# EAGLE board PCB2D (EAGLE 9.7.0)
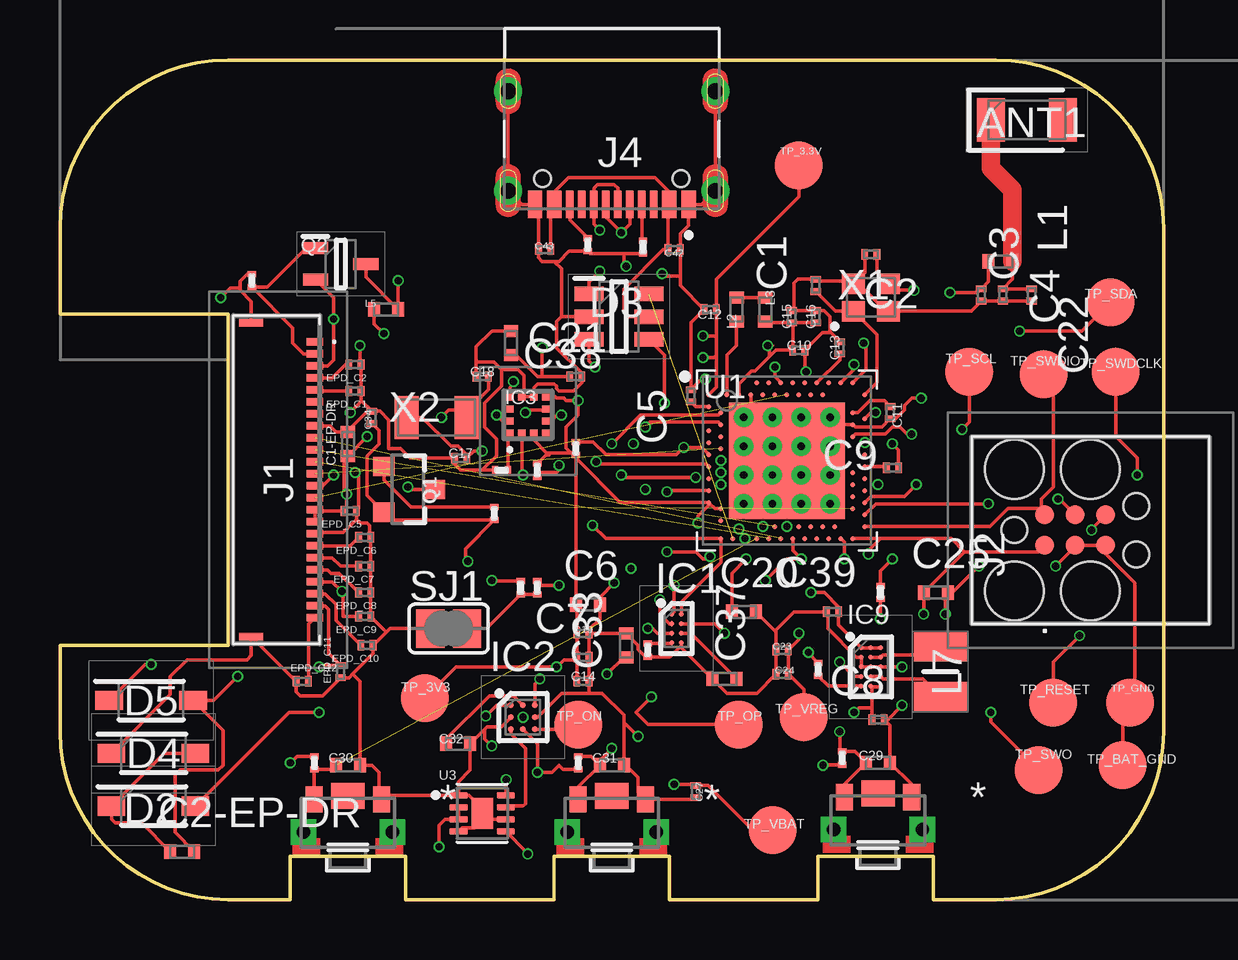
[diagram p0: board, top side]
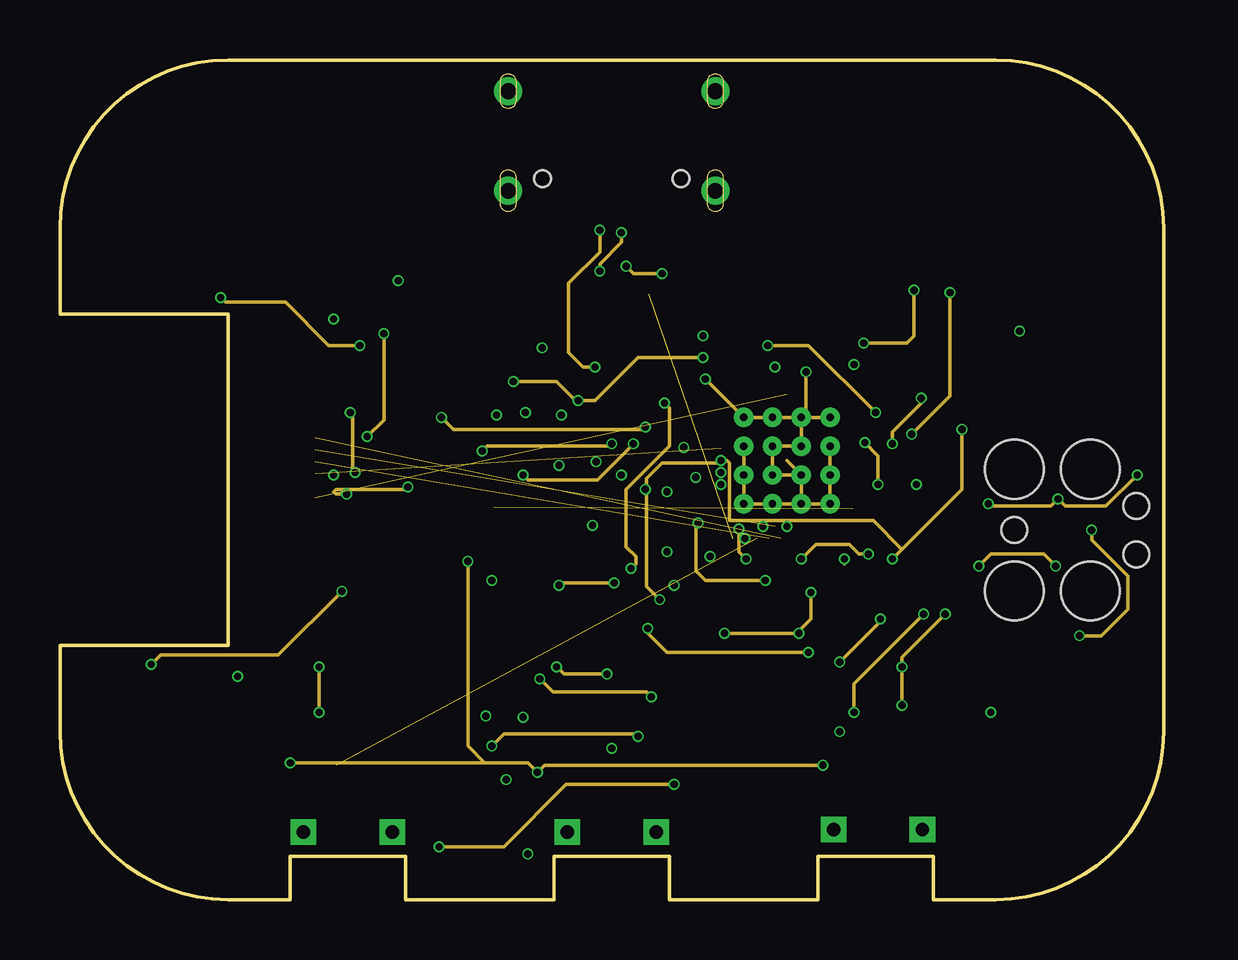
[diagram p1: board, inner layer Route2]
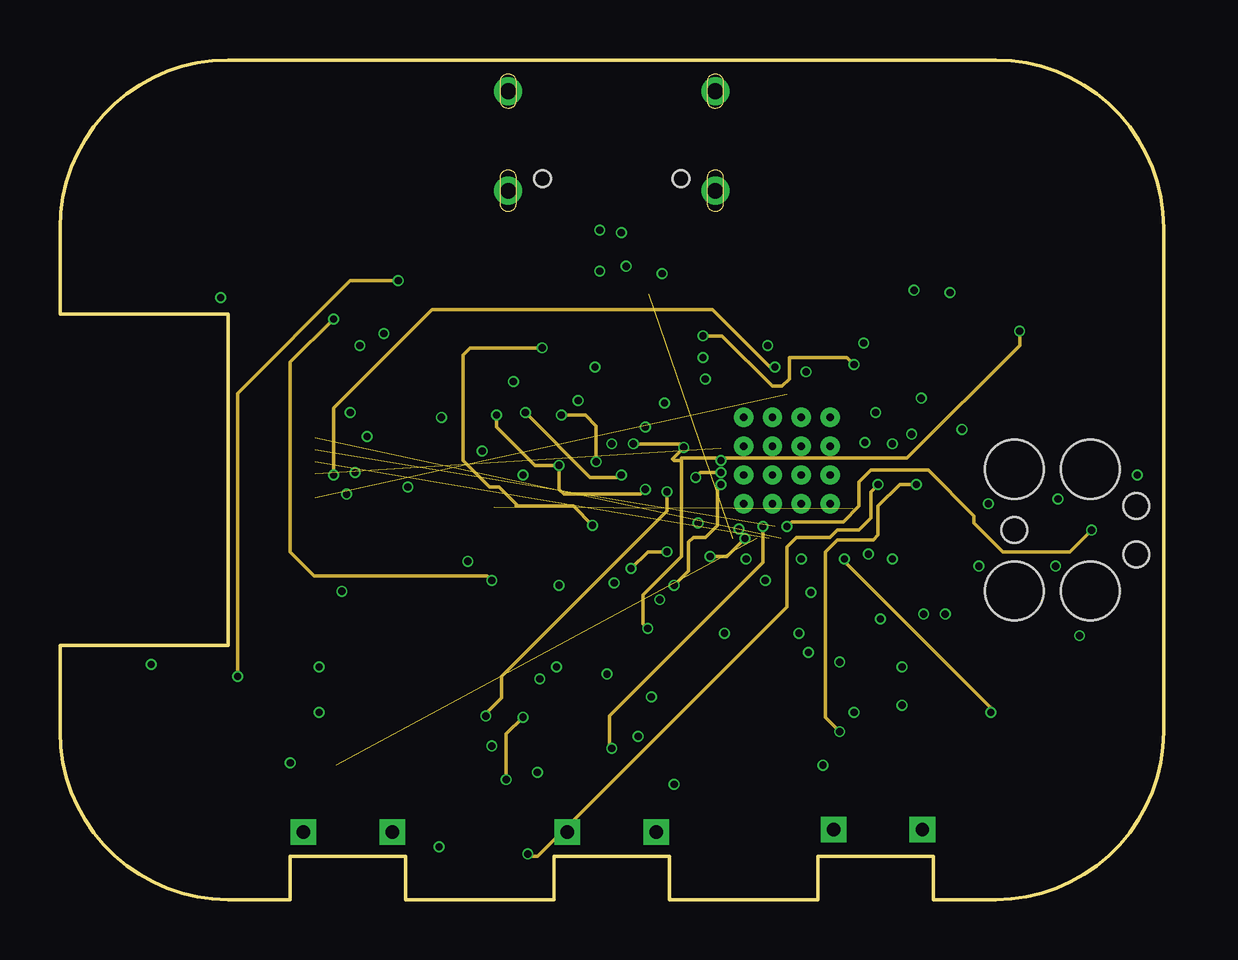
[diagram p2: board, inner layer Route15]
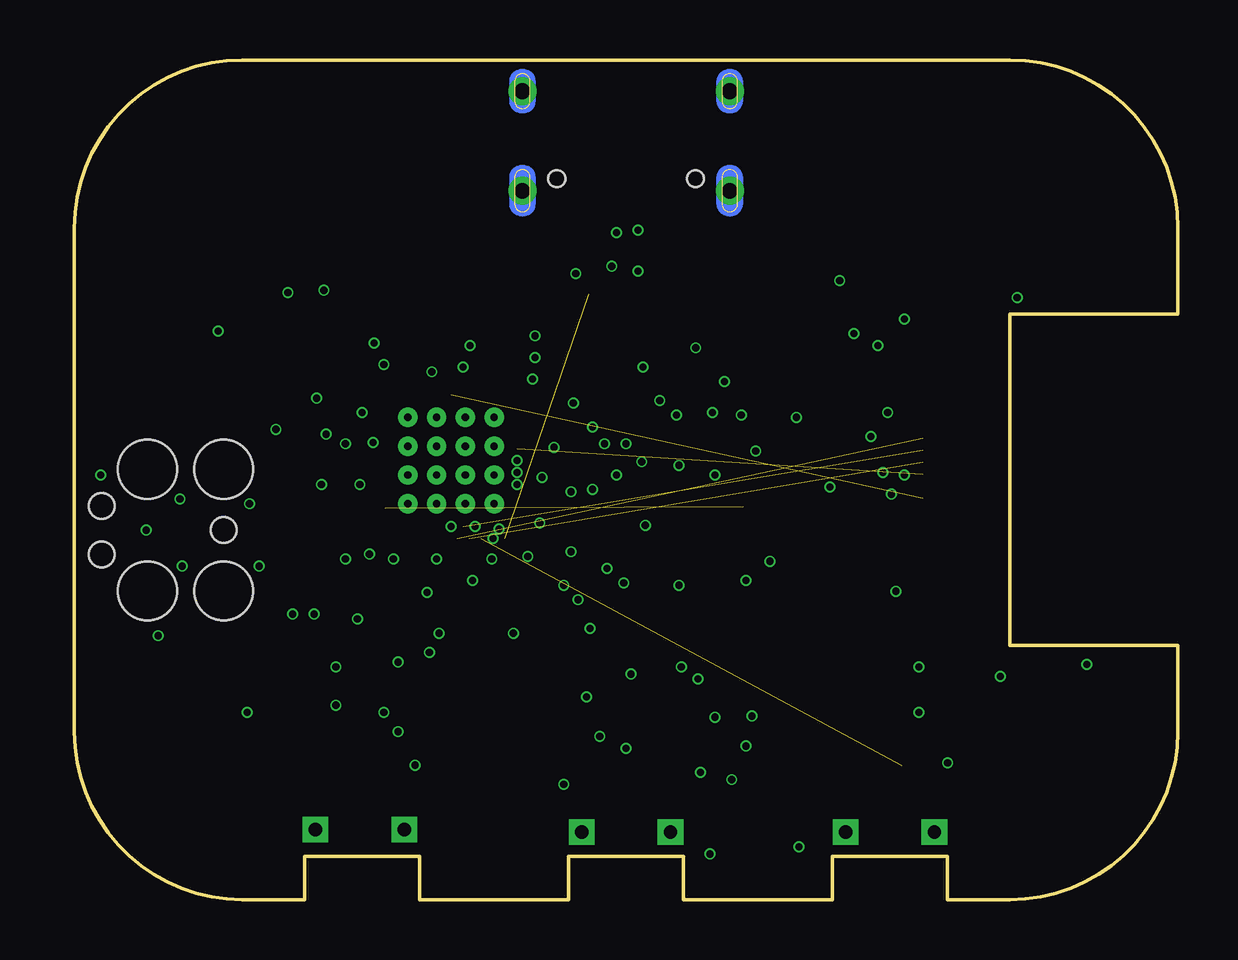
[diagram p3: board, bottom side, seen from below]

Size 46 x 35 mm. Coordinates in mm from the lower left corner, seen from the top.
Outline: 39,0 36.4,0 36.4,1.8 31.6,1.8 31.6,0 25.4,0 25.4,1.8 20.6,1.8 20.6,0 14.4,0 14.4,1.8 9.6,1.8 9.6,0 7,0 arc-90 0,7 0,10.6 7,10.6 7,24.4 0,24.4 0,28 arc-90 7,35 39,35 arc-90 46,28 46,7 arc-90 39,0
Copper layers (1+2*15+16): Top 0.035mm / dielectric 1.6mm / Route2 0.035mm / dielectric 0.15mm / Route15 0.035mm / dielectric 0.2mm / Bottom 0.035mm
Design rules "jlcpcb-2layers.dru *": minimum track width 5mil, minimum drill 0.2mm, track to track 5mil, track to pad 5mil, pad to pad 5mil, via to via 5mil, smd to smd 5mil, copper to edge 0.2mm, drill to drill 6mil, minimum pad ring 10mil, minimum via ring 3mil, stop-mask expansion 4mil, vias tented up to drill 999mm, thermal gap 10mil

## Footprints (pad centres in the part's own frame; a part is rotated, then mirrored left to right if it is on the bottom)
2450AT18B100E_ANTC3216X140N = smd 1.15 x 1.8: 1 -1.5,0; 2 1.5,0
NORDIC_NRF_3_RESC0201_L = smd 0.28 x 0.43: 1 -0.255,0; 2 0.255,0
NORDIC_NRF_3_RESC0402_L = smd 0.5 x 0.6: 1 -0.5,0; 2 0.5,0
ESP32_C6_LIBRARY_5_SOD3716X135N = smd 1.15 x 0.8: 1 -1.75,0; 2 1.75,0
ESP32_C6_LIBRARY_3_SOT95P280X145-6N = smd 1.2 x 0.6: 1 -1.25,0.95; 2 -1.25,0; 3 -1.25,-0.95; 4 1.25,-0.95; 5 1.25,0; 6 1.25,0.95
BQ25180YBGR_BGA8C40P2X4_100X155X50 = smd 0.2 x 0.2: A1 -0.2,0.6; A2 0.2,0.6; B1 -0.2,0.2; B2 0.2,0.2; C1 -0.2,-0.2; C2 0.2,-0.2; D1 -0.2,-0.6; D2 0.2,-0.6
DRV2605YZFR_BGA9C50P3X3_144X144X62 = smd 0.25 x 0.25: A1 -0.5,0.5; A2 0,0.5; A3 0.5,0.5; B1 -0.5,0; B2 0,0; B3 0.5,0; C1 -0.5,-0.5; C2 0,-0.5; C3 0.5,-0.5
BMA423_BMA423 = smd 0.3 x 0.35: 1 -0.75,-0.775; 2 -0.25,-0.775; 3 0.25,-0.775; 4 0.75,-0.775; 7 0.75,0.775; 8 0.25,0.775; 9 -0.25,0.775; 10 -0.75,0.775 | smd 0.35 x 0.3: 5 0.775,-0.25; 6 0.775,0.25; 11 -0.775,0.25; 12 -0.775,-0.25
RT6160AWSC_BGA15C40P3X5_140X230X60 = smd 0.216 x 0.216: A1 -0.4,0.8; A2 0,0.8; A3 0.4,0.8; B1 -0.4,0.4; B2 0,0.4; B3 0.4,0.4; C1 -0.4,0; C2 0,0; C3 0.4,0; D1 -0.4,-0.4; D2 0,-0.4; D3 0.4,-0.4; E1 -0.4,-0.8; E2 0,-0.8; E3 0.4,-0.8
503480-2400_5034802400 = smd 0.3 x 0.7: 1 -5.75,1.525; 2 -5.25,1.525; 3 -4.75,1.525; 4 -4.25,1.525; 5 -3.75,1.525; 6 -3.25,1.525; 7 -2.75,1.525; 8 -2.25,1.525; 9 -1.75,1.525; 10 -1.25,1.525; 11 -0.75,1.525; 12 -0.25,1.525; 13 0.25,1.525; 14 0.75,1.525; 15 1.25,1.525; 16 1.75,1.525; 17 2.25,1.525; 18 2.75,1.525; 19 3.25,1.525; 20 3.75,1.525; 21 4.25,1.525; 22 4.75,1.525; 23 5.25,1.525; 24 5.75,1.525 | smd 0.3 x 1: MP1 -6.54,-1.125; MP2 6.54,-1.125
TC2030-IDC_TC2030IDC = smd 0.783 x 0.783: 1 -0.953,-0.635; 2 -0.953,0.635; 3 0.317,-0.635; 4 0.317,0.635; 5 1.588,-0.635; 6 1.588,0.635 | hole 2.451: -2.223,-2.54; -2.223,2.54; 0.952,-2.54; 0.952,2.54 | hole 1.067: -2.223,0; 2.857,-1.016; 2.857,1.016
KH-TYPE-C-16P_KINGHELM_KH-TYPE-C-16P = smd 0.6 x 1.15: A1_B12 -3.2,4.725; A4_B9 -2.4,4.725; A9_B4 2.4,4.725; A12_B1 3.2,4.725 | smd 0.3 x 1.15: A5 -1.25,4.725; A6 -0.25,4.725; A7 0.25,4.725; A8 1.25,4.725; B5 1.75,4.725; B6 0.75,4.725; B7 -0.75,4.725; B8 -1.75,4.725 | drill 0.65 pad 1.05: SH1 -4.32,0; SH2 4.32,0; SH3 -4.32,4.15; SH4 4.32,4.15 | hole 0.7: -2.89,3.65; 2.89,3.65
NORDIC_NRF_2_RESC0402_L = smd 0.5 x 0.6: 1 -0.5,0; 2 0.5,0
MLP2016SR47MT0S1_INDC2016X100N = smd 1.2 x 2.2: 1 -1.028,0; 2 1.028,0
ESP32_C6_LIBRARY_4_ESP32_C6_LIBRARY_4_ESP32_C6_LIBRARY_4_ESP32_C6_LIBRARY_4_ESP32_WROVER_SPARKFUN-DISCRETESEMI_SOT23-3 = smd 0.8 x 0.9: 1 -0.95,-1; 2 0.95,-1; 3 0,1.1
ESP32_C6_LIBRARY_6_SOT65P210X110-3N = smd 1.05 x 0.5: 1 -1.05,0.65; 2 -1.05,-0.65; 3 1.05,0
CPF0201D7K68C1_0201 = smd 0.35 x 0.25: 1 0,0.275; 2 0,-0.275
ESP32_C6_LIBRARY_7_JUMPER_SJ = smd 1.168 x 1.6: 1 -0.762,0; 2 0.762,0
2025-10-22_07-23-44_LIBRARY_SW_EVP-AKE31A_PAN = smd 0.711 x 1.092: 1 -1.4,-0.972; 2 1.4,-0.972 | drill 0.559 pad 0.914 square: 3 -1.848,0.381; 4 1.848,0.381 | smd 1.397 x 1.092: 5 0,-1.124
HECTOR_WATCH_1_TP20R = smd 2 x 2: TP 0,0
NORDIC_NRF_4_AQFN50P700X700X85_HS-74N = smd 4.85 x 4.85: P$74 0,0 | drill 0.3 pad 0.6: P$75 -1.8,1.8; P$76 -0.6,1.8; P$77 0.6,1.8; P$78 1.8,1.8; P$79 -1.8,0.6; P$80 -0.6,0.6; P$81 0.6,0.6; P$82 1.8,0.6; P$83 -1.8,-0.6; P$84 -0.6,-0.6; P$85 0.6,-0.6; P$86 1.8,-0.6; P$87 -1.8,-1.8; P$88 -0.6,-1.8; P$89 0.6,-1.8; P$90 1.8,-1.8 | smd 0.2 x 0.2: P$A8 -1.25,3.25; P$A10 -0.75,3.25; P$A12 -0.25,3.25; P$A14 0.25,3.25; P$A16 0.75,3.25; P$A18 1.25,3.25; P$A20 1.75,3.25; P$A22 2.25,3.25; P$A23 2.75,3.25; P$AA24 3.25,-2.25; P$AB2 -2.75,-2.5; P$AC5 -2,-2.75; P$AC9 -1,-2.75; P$AC11 -0.5,-2.75; P$AC13 0,-2.75; P$AC15 0.5,-2.75; P$AC17 1,-2.75; P$AC19 1.5,-2.75; P$AC21 2,-2.75; P$AC24 3.25,-2.75; P$AD2 -2.75,-3.25; P$AD4 -2.25,-3.25; P$AD6 -1.75,-3.25; P$AD8 -1.25,-3.25; P$AD10 -0.75,-3.25; P$AD12 -0.25,-3.25; P$AD14 0.25,-3.25; P$AD16 0.75,-3.25; P$AD18 1.25,-3.25; P$AD20 1.75,-3.25; P$AD22 2.25,-3.25; P$AD23 2.75,-3.25; P$B1 -3.25,2.75; P$B3 -2.5,2.75; P$B5 -2,2.75; P$B7 -1.5,2.75; P$B9 -1,2.75; P$B11 -0.5,2.75; P$B13 0,2.75; P$B15 0.5,2.75; P$B17 1,2.75; P$B19 1.5,2.75; P$B24 3.25,2.75; P$C1 -3.25,2.25; P$D2 -2.75,2; P$D23 2.75,2; P$E24 3.25,1.75; P$F2 -2.75,1.5; P$F23 2.75,1.5; P$G1 -3.25,1.25; P$H2 -2.75,1; P$H23 2.75,1; P$J1 -3.25,0.75; P$J24 3.25,0.75; P$K2 -2.75,0.5; P$L1 -3.25,0.25; P$L24 3.25,0.25; P$M2 -2.75,0; P$N1 -3.25,-0.25; P$N24 3.25,-0.25; P$P2 -2.75,-0.5; P$P23 2.75,-0.5; P$R1 -3.25,-0.75; P$R24 3.25,-0.75; P$T2 -2.75,-1; P$T23 2.75,-1; P$U1 -3.25,-1.25; P$U24 3.25,-1.25; P$V23 2.75,-1.5; P$W1 -3.25,-1.75; P$W24 3.25,-1.75; P$Y2 -2.75,-2; P$Y23 2.75,-2
ESP32_C6_LIBRARY_SON50P200X200X80-9N = smd 0.76 x 0.27: 1 -0.985,0.75; 2 -0.985,0.25; 3 -0.985,-0.25; 4 -0.985,-0.75; 5 0.985,-0.75; 6 0.985,-0.25; 7 0.985,0.25; 8 0.985,0.75 | smd 0.9 x 1.3: 9 0,0
NORDIC_NRF_BT-XTAL_2016_N = smd 0.95 x 0.85: 1 -0.725,-0.575; 2 0.725,-0.575; 3 0.725,0.575; 4 -0.725,0.575
NORDIC_NRF_1_XTAL_3215_N = smd 1 x 1.8: 1 -1.25,0; 2 1.25,0

## Placement (x,y rotation side)
ANT1  2450AT18B100E_2450AT18B100E  [2450AT18B100E_ANTC3216X140N]  40.3,32.5 0 top
C1  12pF  [NORDIC_NRF_3_RESC0201_L]  31.5,25.6 90 top
C1-EP-DR  10uF  [NORDIC_NRF_3_RESC0402_L]  12,19 90 top
C2  12pF  [NORDIC_NRF_3_RESC0201_L]  33.8,26.9 180 top
C2-EP-DR  4.7uF/25V  [NORDIC_NRF_3_RESC0402_L]  5.1,2 0 top
C3  1pF  [NORDIC_NRF_3_RESC0201_L]  38.4,25.2 270 top
C4  1pF  [NORDIC_NRF_3_RESC0201_L]  39.3,25.2 270 top
C5  100nF  [NORDIC_NRF_3_RESC0201_L]  26.3,21 90 top
C6  4.7µF  [NORDIC_NRF_3_RESC0402_L]  22,12.3 0 top
C7  100nF  [NORDIC_NRF_3_RESC0201_L]  21.8,10.1 0 top
C8  100nF  [NORDIC_NRF_3_RESC0201_L]  34.1,7.5 0 top
C9  820pF  [NORDIC_NRF_3_RESC0201_L]  34.7,18 0 top
C10  N.C.  [NORDIC_NRF_3_RESC0201_L]  30.8,22.9 0 top
C11  100pF  [NORDIC_NRF_3_RESC0201_L]  34.6,20.3 270 top
C12  100nF  [NORDIC_NRF_3_RESC0201_L]  27.1,24.6 180 top
C13  N.C.  [NORDIC_NRF_3_RESC0201_L]  32.5,23 90 top
C14  4.7µF  [NORDIC_NRF_3_RESC0201_L]  21.8,9.1 0 top
C15  1.0µF  [NORDIC_NRF_3_RESC0201_L]  30.5,24.3 90 top
C16  47nF  [NORDIC_NRF_3_RESC0201_L]  31.5,24.3 90 top
C17  12pF  [NORDIC_NRF_3_RESC0201_L]  16.7,18.4 0 top
C18  12pF  [NORDIC_NRF_3_RESC0201_L]  17.6,21.8 0 top
C19  100nF  [NORDIC_NRF_3_RESC0201_L]  21.8,11.1 0 top
C20  4.7µF  [NORDIC_NRF_3_RESC0402_L]  28.5,12 0 top
C21  4.7µF  [NORDIC_NRF_3_RESC0201_L]  21.5,21.8 0 top
C22  N.C.  [NORDIC_NRF_3_RESC0201_L]  40.5,25.2 270 top
C23  0.1uF  [NORDIC_NRF_3_RESC0201_L]  30.1,10.4 0 top
C24  10uF  [NORDIC_NRF_3_RESC0201_L]  30.1,9.4 0 top
C25  22uF  [NORDIC_NRF_3_RESC0402_L]  36.5,12.8 0 top
C27  0.1uF  [NORDIC_NRF_3_RESC0201_L]  26.5,4.5 270 top
C29  1uF  [NORDIC_NRF_3_RESC0402_L]  34.1,5.7 0 top
C30  1uF  [NORDIC_NRF_3_RESC0402_L]  12,5.6 0 top
C31  1uF  [NORDIC_NRF_3_RESC0402_L]  23,5.6 0 top
C32  1uF  [NORDIC_NRF_3_RESC0402_L]  16.6,6.5 0 top
C33  22uF  [NORDIC_NRF_3_RESC0402_L]  23.6,10.6 90 top
C34  0.1uF  [NORDIC_NRF_3_RESC0201_L]  13,20.1 90 top
C37  1uF  [NORDIC_NRF_3_RESC0402_L]  27.7,9.2 180 top
C38  1uF  [NORDIC_NRF_3_RESC0402_L]  18.8,23.2 90 top
C39  10uF  [NORDIC_NRF_3_RESC0201_L]  32.2,12 180 top
C42  0.1uF  [NORDIC_NRF_3_RESC0201_L]  25.6,27.1 0 top
C43  4.7uF  [NORDIC_NRF_3_RESC0201_L]  20.2,27.1 180 top
D2  ESP32_C6_LIBRARY_5_MBR0530  [ESP32_C6_LIBRARY_5_SOD3716X135N]  3.9,3.9 0 top
D3  ESP32_C6_LIBRARY_3_USBLC6-2SC6Y  [ESP32_C6_LIBRARY_3_SOT95P280X145-6N]  23.3,24.3 0 top
D4  ESP32_C6_LIBRARY_5_MBR0530  [ESP32_C6_LIBRARY_5_SOD3716X135N]  3.9,6.1 0 top
D5  ESP32_C6_LIBRARY_5_MBR0530  [ESP32_C6_LIBRARY_5_SOD3716X135N]  3.8,8.3 0 top
EPD_C1  1uF/50V  [NORDIC_NRF_3_RESC0201_L]  12.3,21.2 180 top
EPD_C2  1uF/50V  [NORDIC_NRF_3_RESC0201_L]  12.3,22.3 180 top
EPD_C5  0.1uF/50V  [NORDIC_NRF_3_RESC0201_L]  12.1,16.2 180 top
EPD_C6  1uF/50V  [NORDIC_NRF_3_RESC0201_L]  12.7,15.1 180 top
EPD_C7  1uF/50V  [NORDIC_NRF_3_RESC0201_L]  12.7,13.9 180 top
EPD_C8  1uF/50V  [NORDIC_NRF_3_RESC0201_L]  12.7,12.8 180 top
EPD_C9  1uF/50V  [NORDIC_NRF_3_RESC0201_L]  12.7,11.8 180 top
EPD_C10  1uF/50V  [NORDIC_NRF_3_RESC0201_L]  12.8,10.6 180 top
EPD_C11  1uF/50V  [NORDIC_NRF_3_RESC0201_L]  11.7,9.5 90 top
EPD_C12  1uF/50V  [NORDIC_NRF_3_RESC0201_L]  10.1,9.1 0 top
IC1  BQ25180YBGR_BQ25180YBGR  [BQ25180YBGR_BGA8C40P2X4_100X155X50]  25.7,11.3 0 top
IC2  DRV2605YZFR_DRV2605YZFR  [DRV2605YZFR_BGA9C50P3X3_144X144X62]  19.3,7.6 0 top
IC3  BMA423_BMA423  [BMA423_BMA423]  19.5,20.2 0 top
IC9  RT6160AWSC_RT6160AWSC  [RT6160AWSC_BGA15C40P3X5_140X230X60]  33.8,9.7 0 top
J1  503480-2400_503480-2400  [503480-2400_5034802400]  9.1,17.5 270 top
J2  TC2030-IDC_TC2030-IDC  [TC2030-IDC_TC2030IDC]  42,15.4 0 top
J4  KH-TYPE-C-16P_KH-TYPE-C-16P  [KH-TYPE-C-16P_KINGHELM_KH-TYPE-C-16P]  23,33.7 180 top
L1  3.9nH  [NORDIC_NRF_2_RESC0402_L]  39.2,26.6 0 top
L2  10µH  [NORDIC_NRF_2_RESC0402_L]  28.2,24.6 90 top
L3  15nH  [NORDIC_NRF_2_RESC0402_L]  29.4,24.6 270 top
L5  68uH  [NORDIC_NRF_2_RESC0402_L]  13.6,24.6 0 top
L7  MLP2016SR47MT0S1_FTC252012SR47MBCA  [MLP2016SR47MT0S1_INDC2016X100N]  36.7,9.5 270 top
Q1  20V/4.2A/52mΩ/1.4W  [ESP32_C6_LIBRARY_4_ESP32_C6_LIBRARY_4_ESP32_C6_LIBRARY_4_ESP32_C6_LIBRARY_4_ESP32_WROVER_SPARKFUN-DISCRETESEMI_SOT23-3]  14.5,17.1 270 top
Q2  ESP32_C6_LIBRARY_6_SI1308EDL-T1-GE3  [ESP32_C6_LIBRARY_6_SOT65P210X110-3N]  11.7,26.5 0 top
R1_EP_DR  0.47  [CPF0201D7K68C1_0201]  19.2,13 180 top
R1_USB  5K1  [CPF0201D7K68C1_0201]  24.3,27.2 180 top
R2  0  [CPF0201D7K68C1_0201]  31.6,9.6 0 top
R2_EP_DR  10K  [CPF0201D7K68C1_0201]  8,25.8 0 top
R2_USB  5K1  [CPF0201D7K68C1_0201]  22,27.3 0 top
R3  0  [CPF0201D7K68C1_0201]  18.4,17.9 90 top
R4  0  [CPF0201D7K68C1_0201]  34.2,12.8 0 top
R5  10k  [CPF0201D7K68C1_0201]  10.6,5.7 180 top
R7  10k  [CPF0201D7K68C1_0201]  32.6,5.9 0 top
R8  10k  [CPF0201D7K68C1_0201]  21.6,5.7 0 top
R9  10K  [CPF0201D7K68C1_0201]  24.5,10.4 180 top
R17  3K3  [CPF0201D7K68C1_0201]  19.9,17.9 0 top
R18  3K3  [CPF0201D7K68C1_0201]  21.5,18.8 180 top
R_PWR_EPD  10K  [CPF0201D7K68C1_0201]  18.1,16.1 0 top
R_TYPE_SEL  2.2  [CPF0201D7K68C1_0201]  19.9,13 0 top
SJ1  [ESP32_C6_LIBRARY_7_JUMPER_SJ]  16.2,11.3 0 top
SW_DN  2025-10-22_07-23-44_LIBRARY_EVP-AKE31ASW_EVP-AKE31A_PAN  [2025-10-22_07-23-44_LIBRARY_SW_EVP-AKE31A_PAN]  34.1,3.3 180 top
SW_ENT  2025-10-22_07-23-44_LIBRARY_EVP-AKE31ASW_EVP-AKE31A_PAN  [2025-10-22_07-23-44_LIBRARY_SW_EVP-AKE31A_PAN]  23,3.2 180 top
SW_UP  2025-10-22_07-23-44_LIBRARY_EVP-AKE31ASW_EVP-AKE31A_PAN  [2025-10-22_07-23-44_LIBRARY_SW_EVP-AKE31A_PAN]  12,3.2 180 top
TP_3.3V  HECTOR_WATCH_1_TPTP20R  [HECTOR_WATCH_1_TP20R]  30.8,30.6 0 top
TP_3V3  HECTOR_WATCH_1_TPTP20R  [HECTOR_WATCH_1_TP20R]  15.2,8.4 0 top
TP_BAT_GND  HECTOR_WATCH_1_TPTP20R  [HECTOR_WATCH_1_TP20R]  44.3,5.6 0 top
TP_GND  HECTOR_WATCH_1_TPTP20R  [HECTOR_WATCH_1_TP20R]  44.6,8.2 0 top
TP_ON  HECTOR_WATCH_1_TPTP20R  [HECTOR_WATCH_1_TP20R]  21.6,7.3 0 top
TP_OP  HECTOR_WATCH_1_TPTP20R  [HECTOR_WATCH_1_TP20R]  28.3,7.3 0 top
TP_RESET  HECTOR_WATCH_1_TPTP20R  [HECTOR_WATCH_1_TP20R]  41.4,8.2 0 top
TP_SCL  HECTOR_WATCH_1_TPTP20R  [HECTOR_WATCH_1_TP20R]  37.9,22 0 top
TP_SDA  HECTOR_WATCH_1_TPTP20R  [HECTOR_WATCH_1_TP20R]  43.8,24.9 0 top
TP_SWDCLK  HECTOR_WATCH_1_TPTP20R  [HECTOR_WATCH_1_TP20R]  44,22 0 top
TP_SWDIO  HECTOR_WATCH_1_TPTP20R  [HECTOR_WATCH_1_TP20R]  41,21.9 0 top
TP_SWO  HECTOR_WATCH_1_TPTP20R  [HECTOR_WATCH_1_TP20R]  40.8,5.4 0 top
TP_VBAT  HECTOR_WATCH_1_TPTP20R  [HECTOR_WATCH_1_TP20R]  29.7,2.9 0 top
TP_VREG  HECTOR_WATCH_1_TPTP20R  [HECTOR_WATCH_1_TP20R]  31,7.6 0 top
U1  NORDIC_NRF_4_NRF52840_QF  [NORDIC_NRF_4_AQFN50P700X700X85_HS-74N]  30.3,18.3 0 top
U3  ESP32_C6_LIBRARY_MAX17048G+T10  [ESP32_C6_LIBRARY_SON50P200X200X80-9N]  17.6,3.6 0 top
X1  32MHz  [NORDIC_NRF_BT-XTAL_2016_N]  33.8,25.1 0 top
X2  32.768kHz  [NORDIC_NRF_1_XTAL_3215_N]  15.7,20.1 0 top

## Library data of the parts
ANT1 = InkTime_v5; ARROW_PART_NUMBER: 2450AT18B100E; ARROW_PRICE-STOCK: https://www.arrow.com/en/products/2450at18b100e/johanson-dielectrics?utm_currency=USD&region=nac; DESCRIPTION: Antennas 2.45GHz ANTENNA; HEIGHT: 1.4mm; MANUFACTURER_NAME: JOHANSON TECHNOLOGY; MANUFACTURER_PART_NUMBER: 2450AT18B100E; MOUSER_PART_NUMBER: 609-2450AT18B100E; MOUSER_PRICE-STOCK: https://www.mouser.co.uk/ProductDetail/Johanson-Technology/2450AT18B100E?qs=yCnrNFeXz%252Bh5MFsFIXGZGA%3D%3D
C1 C1-EP-DR C2 C2-EP-DR C3-C25 C27 C29-C34 C37-C39 C42 C43 EPD_C1 EPD_C2 EPD_C5-EPD_C12 L1-L3 L5 R1_EP_DR R1_USB R2 R2_EP_DR R2_USB R3-R5 R7-R9 R17 R18 R_PWR_EPD R_TYPE_SEL SJ1 TP_3.3V TP_3V3 TP_BAT_GND TP_GND TP_ON TP_OP TP_RESET TP_SCL TP_SDA TP_SWDCLK TP_SWDIO TP_SWO TP_VBAT TP_VREG U1 X1 X2 = InkTime_v5
D2 D4 D5 = InkTime_v5; AVAILABILITY: In Stock; CHECK_PRICES: https://www.snapeda.com/parts/MBR0530/Onsemi/view-part/?ref=eda; DESCRIPTION: Diode Schottky 30 V 500mA Surface Mount SOD-123; MF: ON Semiconductor; MP: MBR0530; PACKAGE: SOD-123-2 ON Semiconductor; PRICE: None; PURCHASE-URL: https://www.snapeda.com/api/url_track_click_mouser/?unipart_id=179458&manufacturer=ON Semiconductor&part_name=MBR0530&search_term=None; SNAPEDA_LINK: https://www.snapeda.com/parts/MBR0530/Onsemi/view-part/?ref=snap
D3 = InkTime_v5; AVAILABILITY: In Stock; CHECK_PRICES: https://www.snapeda.com/parts/USBLC6-2SC6Y/STMicroelectronics/view-part/?ref=eda; DESCRIPTION: 17V Clamp 5A (8/20µs) Ipp Tvs Diode Surface Mount SOT-23-6; MF: STMicroelectronics; MP: USBLC6-2SC6Y; PACKAGE: SOT-23-6 STMicroelectronics; PRICE: None; SNAPEDA_LINK: https://www.snapeda.com/parts/USBLC6-2SC6Y/STMicroelectronics/view-part/?ref=snap
IC1 = InkTime_v5; ARROW_PART_NUMBER: BQ25180YBGR; ARROW_PRICE-STOCK: https://www.arrow.com/en/products/bq25180ybgr/texas-instruments?utm_currency=USD&region=nac; DESCRIPTION: Charger IC Lithium Ion/Polymer, Lithium Iron Phosphate 8-DSBGA (1.6x1.1); HEIGHT: 0.5mm; MANUFACTURER_NAME: Texas Instruments; MANUFACTURER_PART_NUMBER: BQ25180YBGR; MOUSER_PART_NUMBER: 595-BQ25180YBGR; MOUSER_PRICE-STOCK: https://www.mouser.co.uk/ProductDetail/Texas-Instruments/BQ25180YBGR?qs=doiCPypUmgEWjAK%252BJAX6Tw%3D%3D
IC2 = InkTime_v5; ARROW_PART_NUMBER: DRV2605YZFR; ARROW_PRICE-STOCK: https://www.arrow.com/en/products/drv2605yzfr/texas-instruments?region=nac; DESCRIPTION: Haptic Driver for ERM/LRA with Built-In Library and Smart Loop Architecture; HEIGHT: 0.625mm; MANUFACTURER_NAME: Texas Instruments; MANUFACTURER_PART_NUMBER: DRV2605YZFR
IC3 = InkTime_v5; ARROW_PART_NUMBER: BMA423; ARROW_PRICE-STOCK: https://www.arrow.com/en/products/bma423/bosch; DESCRIPTION: Accelerometers Triaxial low-g 12bit Acceleration Sensor; HEIGHT: 1mm; MANUFACTURER_NAME: BOSCH; MANUFACTURER_PART_NUMBER: BMA423; MOUSER_PART_NUMBER: 262-BMA423; MOUSER_PRICE-STOCK: https://www.mouser.co.uk/ProductDetail/Bosch-Sensortec/BMA423?qs=HXFqYaX1Q2xC%252BSgeGoX3mg%3D%3D
IC9 = InkTime_v5; DESCRIPTION: Buck-Boost Regulator Positive Output Step-Up/Step-Down I2C DC-DC Controller IC 15-WL-CSP (BSC) (1.4x2.3); HEIGHT: 0.6mm; MANUFACTURER_NAME: RICHTEK; MANUFACTURER_PART_NUMBER: RT6160AWSC; MOUSER_PART_NUMBER: 835-RT6160AWSC; MOUSER_PRICE-STOCK: https://www.mouser.co.uk/ProductDetail/Richtek/RT6160AWSC?qs=amGC7iS6iy%2FLd9PSoixZXQ%3D%3D
J1 = InkTime_v5; DESCRIPTION: FFC & FPC Connectors 0.5mm FPC RA SMT Dual Contact 24Ckt; HEIGHT: 1.87mm; MANUFACTURER_NAME: Molex; MANUFACTURER_PART_NUMBER: 503480-2400; MOUSER_PART_NUMBER: 538-503480-2400; MOUSER_PRICE-STOCK: https://www.mouser.co.uk/ProductDetail/Molex/503480-2400?qs=OAhjpuo3Vu7efIoxFh9AOw%3D%3D
J2 = InkTime_v5; DESCRIPTION: CABLE ADAPTER 6 POS; HEIGHT: 19mm; MANUFACTURER_NAME: Tag Connect; MANUFACTURER_PART_NUMBER: TC2030-IDC
J4 = InkTime_v5; AVAILABILITY: Not in stock; CHECK_PRICES: https://www.snapeda.com/parts/KH-TYPE-C-16P/Kinghelm/view-part/?ref=eda; MF: kinghelm; MP: KH-TYPE-C-16P; PACKAGE: None; PRICE: None; SNAPEDA_LINK: https://www.snapeda.com/parts/KH-TYPE-C-16P/Kinghelm/view-part/?ref=snap
L7 = InkTime_v5; DESCRIPTION: SMD / SMT Inductors (Coils), L=0.47?H, L x W x T :; HEIGHT: 1mm; JLCPCB: https://jlcpcb.com/partdetail/6763488-FTC252012SR47MBCA/C5832368; MANUFACTURER_NAME: TDK; MANUFACTURER_PART_NUMBER: FTC252012SR47MBCA
Q1 = InkTime_v5; PROD_ID: TRAN-14388
Q2 = InkTime_v5; AVAILABILITY: In Stock; CHECK_PRICES: https://www.snapeda.com/parts/SI1308EDL-T1-GE3/Vishay+Siliconix/view-part/?ref=eda; DESCRIPTION: Si1308EDL-T1-GE3 N-channel MOSFET Transistor, 1.5 A, 30 V, 3-Pin SC-70 | Siliconix / Vishay SI1308EDL-T1-GE3; MF: Vishay Siliconix; MP: SI1308EDL-T1-GE3; PACKAGE: SOT-323 Vishay Semiconductor; PRICE: None; PURCHASE-URL: https://www.snapeda.com/api/url_track_click_mouser/?unipart_id=274603&manufacturer=Vishay Siliconix&part_name=SI1308EDL-T1-GE3&search_term=None; SNAPEDA_LINK: https://www.snapeda.com/parts/SI1308EDL-T1-GE3/Vishay+Siliconix/view-part/?ref=snap
SW_DN SW_ENT SW_UP = InkTime_v5; COPYRIGHT: Copyright (C) 2025 Ultra Librarian. All rights reserved.; DIGI-KEY_PART_NUMBER_1: P123437TR-ND; DIGI-KEY_PART_NUMBER_2: P123437CT-ND; DIGI-KEY_PART_NUMBER_3: P123437DKR-ND; MANUFACTURER_NAME: Panasonic; MANUFACTURER_PART_NUMBER: EVP-AKE31A
U3 = InkTime_v5; AVAILABILITY: In Stock; CHECK_PRICES: https://www.snapeda.com/parts/MAX17048G+T10/Analog+Devices/view-part/?ref=eda; DESCRIPTION: 3µA 1-Cell/2-Cell Fuel Gauge with ModelGauge; MF: Analog Devices; MP: MAX17048G+T10; PACKAGE: TDFN-8 Maxim; PRICE: None; PURCHASE-URL: https://www.snapeda.com/api/url_track_click_mouser/?unipart_id=329239&manufacturer=Analog Devices&part_name=MAX17048G+T10&search_term=None; SNAPEDA_LINK: https://www.snapeda.com/parts/MAX17048G+T10/Analog+Devices/view-part/?ref=snap

## Nets
3V3/1.7D: C34.1 IC2.C2 Q1.2 R5.2 R7.2 R8.2 R_PWR_EPD.2
3V3/2.4A: C6.1 C7.1 C8.1 C12.1 C14.1 C19.1 C25.1 C33.1 IC3.3 IC3.7 IC3.10 IC9.E2 IC9.E3 J2.1 R17.1 R18.1 TP_3.3V.TP TP_3V3.TP U1.P$A22 U1.P$AD14 U1.P$AD23 U1.P$B1 U1.P$W1 U1.P$Y2
ALERT: U1.P$J24 U3.5
D+: D3.4 U1.P$AD6
D-: D3.6 U1.P$AD4
DEC1: C5.1 U1.P$C1
DEC3: C11.1 U1.P$D23
DEC4_6: C10.1 C15.1 C16.1 L3.2 U1.P$B5 U1.P$E24
DN: D3.1 J4.A7 J4.B7
DP: D3.3 J4.A6 J4.B6
EPD_3V3: C1-EP-DR.1 EPD_C5.2 J1.15 J1.16 L5.1 Q1.3
EPD_BUSY: J1.9 U1.P$AD12
EPD_CS: J1.12 U1.P$K2
EPD_DC: J1.11 U1.P$AD10
EPD_RST: J1.10 U1.P$AC11
GDR: J1.2 Q2.1 R2_EP_DR.2
GND: C1-EP-DR.2 C1.2 C2.2 C3.2 C4.2 C5.2 C6.2 C7.2 C8.2 C9.2 C10.2 C11.2 C12.2 C13.2 C14.2 C15.2 C16.2 C17.1 C18.1 C19.2 C20.2 C21.2 C22.2 C23.1 C24.1 C25.2 C27.2 C29.2 C30.2 C31.2 C32.2 C33.2 C34.2 C37.2 C38.2 C39.2 C42.2 C43.2 D3.2 D4.1 EPD_C1.1 EPD_C2.1 EPD_C5.1 EPD_C6.1 EPD_C7.1 EPD_C8.1 EPD_C9.1 EPD_C10.1 EPD_C11.1 EPD_C12.1 IC1.D2 IC2.B1 IC2.B3 IC3.8 IC3.9 IC9.B1 IC9.C1 IC9.C2 IC9.C3 J1.8 J1.17 J1.MP1 J1.MP2 J2.3 J2.5 J4.A1_B12 J4.A12_B1 J4.SH1 J4.SH2 J4.SH3 J4.SH4 R1_USB.1 R2_EP_DR.1 R2_USB.2 R3.1 R9.1 R_TYPE_SEL.1 SJ1.1 SW_DN.1 SW_ENT.1 SW_UP.1 TP_BAT_GND.TP TP_GND.TP U1.P$74 U1.P$75 U1.P$76 U1.P$77 U1.P$78 U1.P$79 U1.P$80 U1.P$81 U1.P$82 U1.P$83 U1.P$84 U1.P$85 U1.P$86 U1.P$87 U1.P$88 U1.P$89 U1.P$90 U1.P$B7 U1.P$F23 U3.1 U3.4 U3.6 U3.9 X1.2 X1.4
HAPTIC_EN: IC2.A1 U1.P$U1
IMU_INT1: IC3.5 U1.P$N1
IMU_INT2: IC3.6 U1.P$P2
LX1: IC9.B2 IC9.B3 L7.1
LX2: IC9.D2 IC9.D3 L7.2
MOSI: J1.14 U1.P$B13
N$1: C20.1 U1.P$AC5
N$4: L2.1 U1.P$B3
N$5: L2.2 L3.1
N$6: C1.1 U1.P$B24 X1.1
N$7: C2.1 U1.P$A23 X1.3
N$9: C9.1 U1.P$N24
N$10: C13.1 U1.P$A18
N$11: C3.1 L1.1 U1.P$H23
N$17: IC1.D1 R9.2
N$34: IC3.1 R3.2
N$42: IC9.D1 R4.2
N$43: IC9.E1 R2.2
N$55: C2-EP-DR.2 D5.2 L5.2 Q2.3
N$57: C32.1 IC2.A2
N$59: C2-EP-DR.1 D2.1 D4.2
N$62: R1_EP_DR.1 R_TYPE_SEL.2 SJ1.2
N$63: EPD_C2.2 J1.4
N$64: EPD_C1.2 J1.5
N$65: J4.A5 R1_USB.2
N$67: EPD_C6.2 J1.18
N$68: EPD_C7.2 J1.19
N$69: EPD_C8.2 J1.20
N$71: EPD_C10.2 J1.22
N$74: EPD_C12.2 J1.24
N$77: J4.B5 R2_USB.1
OUT+: IC2.A3 TP_OP.TP
OUT-: IC2.C3 TP_ON.TP
P0.00/XL1: C17.2 U1.P$D2 X2.1
P0.01/XL2: C18.2 U1.P$F2 X2.2
P0.04: U1.P$J1
P0.09: U1.P$L24
P0.13: C30.1 R5.1 SW_UP.2 U1.P$AD8
P0.14: C31.1 R8.1 SW_ENT.2 U1.P$AC9
P0.19: U1.P$AC15
P0.20: U1.P$AD16
P0.21: U1.P$AC17
P0.22: U1.P$AD18
P0.23: U1.P$AC19
P0.24: U1.P$AD20
P0.25: U1.P$AC21
P0.26: U1.P$G1
P0.27: U1.P$H2
P0.28: U1.P$B11
P0.29: U1.P$A10
P0.30: U1.P$B9
P0.31: U1.P$A8
P1.01: Q1.1 R_PWR_EPD.1 U1.P$Y23
P1.02: C29.1 R7.1 SW_DN.2 U1.P$W24
P1.03: U1.P$V23
P1.04: U1.P$U24
P1.05: U1.P$T23
P1.06: U1.P$R24
P1.07: U1.P$P23
P1.09: U1.P$R1
P1.10: U1.P$A20
P1.11: U1.P$B19
P1.12: U1.P$B17
P1.13: U1.P$A16
P1.14: U1.P$B15
P1.15: U1.P$A14
PMIC_INT: IC1.A1 U1.P$T2
PREVGH: D5.1 EPD_C9.2 J1.21
PREVGL: D2.2 EPD_C11.2 J1.23
RESE: J1.3 Q2.2 R1_EP_DR.2
RESET: J2.6 TP_RESET.TP U1.P$AC13
RF: ANT1.1 C4.1 C22.1 L1.2
SCK: J1.13 U1.P$A12
SCL/1.4C: IC2.C1 U3.7
SCL/2.4C: IC1.B1 IC3.12 R4.1 R17.2 TP_SCL.TP U1.P$M2
SDA/1.4C: IC2.B2 U3.8
SDA/2.4C: IC1.C1 IC3.2 R2.1 R18.2 TP_SDA.TP U1.P$L1
SWDCLK: J2.4 TP_SWDCLK.TP U1.P$AA24
SWDIO: J2.2 TP_SWDIO.TP U1.P$AC24
SWO: TP_SWO.TP U1.P$AD22
VBAT/1.2A: C27.1 TP_VBAT.TP U3.2 U3.3
VBAT/2.5C: C37.1 IC1.C2
VBUS/1.5D: C42.1 C43.1 D3.5 J4.A4_B9 J4.A9_B4
VBUS/2.6D: C21.1 C38.1 IC1.A2 U1.P$AD2
VREG: C23.2 C24.2 C39.1 IC1.B2 IC9.A1 IC9.A2 IC9.A3 TP_VREG.TP

## Tracks (layer width: path | path; a pad name or v marks a point on that pad's centre or on a via)
3V3/1.7D  (via drill 0.3)
  Top 0.152: R8.2 20.98,5.43 20.8,5.6 20.5,5.3 v19.9,5.3 19.9,6.5 IC2.C2 | R5.2 9.88,5.97 v9.6,5.7 | R7.2 31.82,5.62 v31.8,5.6 | v17,14.1 16.9,14.2 16.9,14.62 R_PWR_EPD.2 13.82,15.82 Q1.2 12.8,16.85 12.8,18.5 13.3,19 13.3,19.55 C34.1
  Route2 0.152: v9.6,5.7 17.7,5.7 | 17.7,5.7 19.5,5.7 v19.9,5.3 20.2,5.6 v31.8,5.6 | v17,14.1 17,6.4 17.7,5.7
3V3/2.4A  (via drill 0.3)
  Top 0.152: 37.7,14.5 C25.1 v36,11.9 | 37.7,14.5 40.78,14.5 J2.1 | C8.1 33.84,8 | 33.84,8 33.84,8.86 | 33.84,8.86 IC9.E2 | IC9.E3 34.16,8.86 33.84,8.86 | TP_3.3V.TP 30.8,29.3 27.36,25.86 C12.1 27.36,23.4 | C14.1 21.55,10 | 21.55,10 C7.1 C19.1 21.55,12.25 C6.1 21.5,18.4 | R18.1 21.5,18.4 | 21.5,18.4 23.35,16.55 U1.P$W1 27.1,16.5 | R18.1 21.4,18.62 20.27,18.62 | 20.27,18.62 20.38,18.52 20.25,18.52 R17.1 | 20.27,18.62 19.75,19.15 IC3.3 | C33.1 23.5,10.1 v22.8,9.4 | 21.55,10 21,10 v20.7,9.7 16.5,9.7 TP_3V3.TP | 27.36,23.4 27.36,22.7 | 27.36,22.7 27.36,21.36 U1.P$B1 | U1.P$AD23 34.2,15.05 | 34.2,15.05 37.15,15.05 37.7,14.5 | v33.1,7.8 33.3,8 33.84,8 | 34.2,15.05 33.7,14.55 v33.7,14.4 | U1.P$AD14 30.55,14.55 v30.9,14.2 30.3,14.2 v29.4,13.3 | U1.P$Y2 27.3,16.3 27.1,16.5 | R18.1 21.4,18.52 21.1,18.82 21.1,19.7 21.6,20.2 v21.6,20.8 21.1,20.8 21,20.9 20.7,20.9 20.62,20.98 IC3.7 | IC3.10 18.75,21.35 18.9,21.5 v18.9,21.6 | 27.36,22.7 27.25,22.6 v26.8,22.6 | 27.36,23.4 27.25,23.5 v26.8,23.5 | v33.1,22.3 33.1,22.1 U1.P$A22 | v26.6,15.7 26.6,16 27.1,16.5
  Route2 0.152: v22.8,9.4 21,9.4 v20.7,9.7 | v36,11.9 33.1,9 v33.1,7.8 | v33.7,14.4 33.3,14.4 32.9,14.8 31.5,14.8 v30.9,14.2 | v18.9,21.6 20.7,21.6 21.6,20.7 v21.6,20.8 22.3,20.8 24.1,22.6 v26.8,22.6 | v29.4,13.3 26.9,13.3 26.5,13.7 26.5,15.6 v26.6,15.7
  Route15 0.152: v26.8,23.5 27.6,23.5 29.7,21.4 30.1,21.4 30.4,21.7 30.4,22.6 32.8,22.6 v33.1,22.3
ALERT  (via drill 0.3)
  Top 0.152: U3.5 19.43,2 19.5,2 v19.5,1.9
  Route2 0.152: v34.1,17.3 34.1,18.5 U1.P$J24
  Route15 0.152: v19.5,1.9 19.6,1.8 19.9,1.8 30.3,12.2 30.3,14.7 30.7,15.1 32.1,15.1 32.4,15.4 33.3,15.4 33.8,15.9 33.8,17 v34.1,17.3
  other vias: 33.55,19.05
D+  (via drill 0.3)
  Top 0.152: D3.4 25.2,22.7 v25.2,20.7 | v25.3,14.5 26.5,14.5 26.8,14.2 27,14.2 v27.1,14.3
  Route2 0.152: v25.2,20.7 25.4,20.5 25.4,18.9 23.6,17.1 23.6,14.7 24,14.3 24,14 v23.8,13.8
  Route15 0.152: v23.8,13.8 24.5,14.5 v25.3,14.5 | v27.1,14.3 27.8,14.3 U1.P$AD6
  other vias: 28.55,15.05
D-  (1 unrouted)
DEC1
  Top 0.152: U1.P$C1 26.5,20.55 C5.1
DEC3
  Top 0.152: C11.1 34.36,20.8 33.75,20.8 33.25,20.3 U1.P$D23
DEC4_6  (via drill 0.3)
  Top 0.152: C15.1 C16.1 | 29.57,22.63 29.84,22.9 C10.1 30.55,24 C15.1 | 29.57,22.63 28.97,22.03 28.83,22.03 28.3,21.5 U1.P$B5 | C15.1 29.45,24.05 L3.2 | U1.P$E24 33.8,20.3 v34,20.3 | 29.7,23.1 v29.5,23.1 29.57,23.03 29.57,22.63
  Route2 0.152: v34,20.3 31.2,23.1 v29.5,23.1
DN  (via drill 0.3)
  Top 0.152: D3.1 22.05,25.75 v22.5,26.2 | J4.A7 22.75,28.45 v23.4,27.8 23.75,28.15 J4.B7
  Route2 0.152: v22.5,26.2 22.5,26.5 23.4,27.4 v23.4,27.8
DP  (via drill 0.3)
  Top 0.152: v22.5,27.9 22.25,28.15 J4.B6 22.25,29.65 22.4,29.8 23.1,29.8 23.25,29.65 J4.A6 | v22.3,22.2 22.05,22.45 D3.3
  Route2 0.152: v22.5,27.9 22.5,27 21.2,25.7 21.2,22.8 21.8,22.2 v22.3,22.2
EPD_3V3  (via drill 0.3)
  Top 0.152: 10.68,16.2 EPD_C5.2 11.95,16.3 v11.95,16.9 11.85,17 11.85,18.34 C1-EP-DR.1 v12.8,19.3 | 10.68,16.2 J1.15 | J1.16 10.62,16.15 10.68,16.2 | Q1.3 14.6,17.1 v14.5,17.2 | v13.5,23.6 13.1,24 L5.1
  Route2 0.152: v14.5,17.2 14.4,17.1 11.5,17.1 11.4,17 11.5,16.9 v11.95,16.9 | v12.8,19.3 13.5,20 v13.5,23.6
EPD_BUSY  (1 unrouted)
EPD_CS  (1 unrouted)
EPD_DC  (1 unrouted)
EPD_RST  (1 unrouted)
GDR
  Top 0.152: Q2.1 10.25,27.15 8.62,25.52 R2_EP_DR.2 9.7,23.82 9.7,23.2 10.15,22.75 J1.2
GND  (via drill 0.3)
  Top 0.152: U3.6 17.85,3.35 17.65,3.55 | 17.65,3.55 U3.9 17.6,3.8 17.05,4.35 U3.1 | U3.4 16.77,3 17.3,3 17.65,3.35 17.65,3.55 | U3.1 13.58,4.35 SW_UP.1 13.3,4.27 13.3,5.3 13,5.6 C30.2 12.5,9.1 12.2,9.4 | U3.1 16.62,4.91 17.1,5.4 C32.2 17.7,7.1 | C27.2 26.43,4.17 SW_ENT.1 24.1,4.47 24.1,5.1 23.6,5.6 C31.2 23.5,7.3 | 17.7,7.1 17.8,7.2 18.4,7.2 IC2.B1 | SW_DN.1 35.5,4.8 C29.2 34.6,7.26 C8.2 34.5,7.5 v35.1,8.1 | C22.2 C4.2 C3.2 37.98,24.52 X1.2 34.42,24.52 33.27,25.68 X1.4 | C2.2 33.55,26.14 X1.4 | X1.4 32.98,25.77 31.58,25.77 C1.2 30.75,25.86 30.6,25.7 30.6,24.55 | C13.2 32.13,23.63 | 32.13,23.63 32.1,23.66 32.1,24.3 31.84,24.55 C16.2 30.6,24.55 | 32.13,23.63 31.78,23.63 C10.2 31.05,22.05 v31.1,22 | C15.2 30.6,24.55 | 20.6,26.6 20.8,26.6 21.23,27.02 R2_USB.2 22.1,26.93 23.5,26.93 | 20.6,26.6 20.1,26.6 19.95,26.76 C43.2 19.95,28.83 J4.A12_B1 19.25,28.98 J4.SH4 J4.SH2 | J4.SH1 J4.SH3 26.75,28.98 J4.A1_B12 26.2,28.1 25.86,27.76 C42.2 25.86,26 | TP_BAT_GND.TP 44.3,7.9 TP_GND.TP 44.8,8.4 44.8,13.2 43.59,14.41 J2.5 J2.3 42.32,14.72 v41.5,13.9 | 29.8,11.2 29.84,11.16 C23.1 C24.1 29.05,8.6 27.8,8.6 C37.2 25.9,10.5 IC1.D2 25.9,10.6 25.43,10.12 R9.1 24.4,10.12 24.1,10.43 24.1,10.6 C33.2 C19.2 | 29.8,11.2 C20.2 | 25.86,26 25.86,25.59 C12.2 26.3,24.05 C5.2 26.75,21.7 v26.9,21.7 | J1.MP1 7.97,24.93 7.5,25.4 7.5,25.5 | 7.5,25.5 7.5,25.77 7.8,26.07 R2_EP_DR.1 | J1.8 11.25,19.75 11.5,19.5 C1-EP-DR.2 12,19.55 12.9,20.45 12.9,20.36 C34.2 | D4.1 4.6,8.55 4.6,9.3 5.3,10 7.8,10 7.97,10.18 J1.MP2 EPD_C12.1 9.85,8.65 10,8.5 10.96,8.5 EPD_C11.1 12.04,9.24 12.2,9.4 | v38.3,13.9 37.2,12.8 C25.2 36.9,12.7 v36.9,11.9
  Top 0.152: C19.2 C7.2 C14.2 22.05,8.65 22,8.6 | C19.2 22.05,11.25 22.5,11.7 C6.2 22.5,12.6 v23.1,13.2 | D3.2 20.9,24.3 | 20.9,24.3 20.7,24.1 20.7,23 21.75,21.95 C21.2 21.75,21.55 21.4,21.2 20.8,21.2 20.7,21.3 20.7,21.4 20.6,21.5 19.9,21.5 19.75,21.35 IC3.8 IC3.9 19.35,21.07 19.35,21.85 19.1,22.1 18.4,22.1 | 20.6,26.6 20.9,26.3 20.9,24.3 | R1_USB.1 23.5,26.93 | 25.86,26 25.2,26 v25.1,26.1 | v23.6,26.4 23.5,26.5 23.5,26.93 | C38.2 18,23.7 17.34,23.05 17.34,22.5 | 17.34,22.5 C18.1 | 17.34,22.5 17.45,22.4 18.1,22.4 18.4,22.1 | C17.1 16.4,18.4 | 16.4,18.4 14.6,18.4 14.2,18.8 13.7,18.8 13.7,20 13.35,20.36 C34.2 | 13.63,11.17 EPD_C10.1 13.05,10.25 12.2,9.4 | 13.63,11.17 13.76,11.3 SJ1.1 | 13.63,11.17 13.58,11.17 EPD_C9.1 EPD_C8.1 EPD_C7.1 EPD_C6.1 12.9,15.15 12.9,15.6 12.8,15.7 12.5,15.7 12.36,15.85 | J1.17 10.68,15.3 11.81,15.3 12.36,15.85 | 12.36,15.85 EPD_C5.1 12.46,16.3 12.46,17.64 v12.3,17.8 | R3.1 17.6,17.9 | 17.6,17.9 16.7,17.9 16.4,18.2 16.4,18.4 | 22,8.6 20.9,8.6 19.9,7.6 IC2.B3 | 23.5,7.3 23.5,7.7 22.6,8.6 22,8.6 | v20.8,13.1 20.07,13.1 R_TYPE_SEL.1 | 12.55,20.8 EPD_C1.1 EPD_C2.1 12.5,22.36 v12.5,23.1 | 12.55,20.8 C34.2 | v6.7,25.1 7.1,25.5 7.5,25.5 | v35.1,9.7 IC9.C3 IC9.C2 IC9.C1 IC9.B1 33.2,10.1 32,11.3 32,11.95 C39.2 30.6,12 29.8,11.2 | C9.2 34.95,18.75 v34.7,19 | v35.9,20.9 35.5,20.9 35.2,20.6 35.2,20.4 34.84,20.05 C11.2 34.26,19.7 33.15,19.7 U1.P$F23 32.4,19.8 U1.P$78 | 18.4,22.1 18.4,21.4 17.7,20.7 17.7,19.7 18.2,19.2 18.2,18.5 17.6,17.9 | v12.1,20.3 12.55,20.75 12.55,20.8 | 17.7,7.1 17.7,6.7 v18,6.4 | v24.1,6.8 23.6,7.3 23.5,7.3 | U1.P$B7 28.8,20.4 U1.P$75
  Route2 0.152: v38.3,13.9 38.8,14.4 41,14.4 v41.5,13.9 | v25.1,26.1 23.9,26.1 v23.6,26.4 | v23.1,13.2 20.9,13.2 v20.8,13.1 | v12.5,23.1 11.2,23.1 9.4,24.9 6.9,24.9 v6.7,25.1 | v35.1,8.1 v35.1,9.7 35.1,10.1 v36.9,11.9 | v26.9,21.7 U1.P$75 U1.P$76 U1.P$77 | U1.P$77 U1.P$78 | U1.P$89 U1.P$90 U1.P$86 U1.P$82 | U1.P$89 U1.P$88 U1.P$87 U1.P$83 U1.P$79 | U1.P$77 U1.P$81 U1.P$80 U1.P$84 U1.P$85 | U1.P$85 U1.P$89 | v34.7,19 34.7,19.5 35.9,20.7 v35.9,20.9 | v31.1,22 31.1,20.3 U1.P$77 | v12.3,17.8 12.2,17.9 12.2,20.2 v12.1,20.3 | v18,6.4 18.5,6.9 24,6.9 v24.1,6.8 | U1.P$85 U1.P$74
HAPTIC_EN  (via drill 0.3)
  Top 0.152: U1.P$U1 25.35,17.05 v25.3,17 | v17.75,7.65 18.2,8.1 IC2.A1
  Route15 0.152: v25.3,17 25.3,16.2 18.4,9.3 18.4,8.4 17.7,7.7 v17.75,7.65
IMU_INT1  (via drill 0.3)
  Top 0.152: U1.P$N1 26.95,18.15 22.35,18.15 v22.35,18.25 | v20.9,20.2 20.73,20.2 20.48,19.95 IC3.5
  Route15 0.152: v22.35,18.25 22.35,19.75 21.9,20.2 v20.9,20.2
IMU_INT2  (via drill 0.3)
  Top 0.152: IC3.6 20.23,20.4 19.5,20.4 v19.4,20.3 | v26.5,17.6 23.5,17.6 v23.4,17.7
  Route15 0.152: v19.4,20.3 22.1,17.6 23.3,17.6 v23.4,17.7 | v26.5,17.6 26.7,17.8 U1.P$P2
  other vias: 27.55,17.8
LX1
  Top 0.152: L7.1 36.37,10.2 34.3,10.2 IC9.B3 IC9.B2
LX2
  Top 0.152: L7.2 35.97,9.2 34.3,9.2 IC9.D3 IC9.D2
MOSI  (1 unrouted)
N$1  (via drill 0.3)
  Top 0.152: C20.1 28,13.6 v28.6,14.2 | U1.P$AC5 v28.3,15.45
  Route2 0.152: v28.3,15.45 28.3,14.5 v28.6,14.2
N$4
  Top 0.152: U1.P$B3 27.8,22.7 28.2,23.1 L2.1
N$5
  Top 0.152: L2.2 L3.1
N$6
  Top 0.152: C1.1 32.32,24.52 X1.1 34.05,23.55 34.05,21.55 U1.P$B24
N$7  (via drill 0.3)
  Top 0.152: C2.1 34.05,26.14 X1.3 34.8,25.4 v35.6,25.4 | v33.5,23.2 33.6,23.1 33.6,22.1 U1.P$A23
  Route2 0.152: v35.6,25.4 35.6,23.5 35.3,23.2 v33.5,23.2
N$9
  Top 0.152: C9.1 34.39,18.05 U1.P$N24
N$10
  Top 0.152: C13.1 32.5,22.5 U1.P$A18
N$11  (via drill 0.3)
  Top 0.152: L1.1 38.7,25.76 C3.1 38.24,25.3 v37.1,25.3 | U1.P$H23 33.15,19.4 34.4,19.4 34.7,19.7 35,19.7 35.3,19.4 v35.5,19.4
  Route2 0.152: v37.1,25.3 37.1,21 v35.5,19.4
N$17
  Top 0.152: IC1.D1 25.48,10.68 R9.2
N$34
  Top 0.152: IC3.1 18.68,19.35 R3.2
N$42  (via drill 0.3)
  Top 0.152: R4.2 v34.2,11.7 | v32.5,9.9 33.1,9.3 IC9.D1
  Route2 0.152: v34.2,11.7 34.2,11.6 v32.5,9.9
N$43
  Top 0.152: R2.2 32.02,8.9 IC9.E1
N$55  (via drill 0.3)
  Top 0.152: C2-EP-DR.2 4.8,2.8 4.8,5.2 5,5.4 6.6,5.4 6.8,5.6 6.8,7.05 D5.2 6.4,8.3 v7.4,9.3 | Q2.3 12.75,25.95 L5.2 v14.1,25.8
  Route15 0.152: v7.4,9.3 7.4,21.1 12.1,25.8 v14.1,25.8
N$57
  Top 0.152: C32.1 16.1,6.7 17.9,8.5 18.9,8.5 IC2.A2
N$59
  Top 0.152: C2-EP-DR.1 3.4,3.2 2.3,3.2 2.15,3.35 D2.1 4.35,6.1 D4.2
N$62
  Top 0.152: SJ1.2 17.77,11.3 R1_EP_DR.1 R_TYPE_SEL.2
N$63
  Top 0.152: EPD_C2.2 11.9,22.3 11.35,21.75 J1.4
N$64
  Top 0.152: EPD_C1.2 10.68,21.2 J1.5
N$65
  Top 0.152: R1_USB.2 24.25,27.52 J4.A5
N$67
  Top 0.152: EPD_C6.2 12.1,14.75 J1.18
N$68
  Top 0.152: EPD_C7.2 11.7,13.9 11.35,14.25 J1.19
N$69
  Top 0.152: EPD_C8.2 11.64,13.6 11.3,13.6 11.15,13.75 J1.20
N$71
  Top 0.152: EPD_C10.2 11.5,11.64 11.5,12.3 11.05,12.75 J1.22
N$74
  Top 0.152: EPD_C12.2 10.36,11.48 J1.24
N$77
  Top 0.152: R2_USB.1 21.25,28.32 J4.B5
OUT+  (via drill 0.3)
  Top 0.152: TP_OP.TP 24.5,7.3 24,7.8 v24.65,8.45 | v20,9.2 19.8,9 IC2.A3
  Route2 0.152: v24.65,8.45 24.45,8.65 20.55,8.65 v20,9.2
OUT-
  Top 0.152: TP_ON.TP 21.4,7.1 IC2.C3
P0.00/XL1  (via drill 0.3)
  Top 0.152: X2.1 15.1,20.1 16.3,18.9 16.6,18.9 16.95,18.55 C17.2 17.25,18.7 v17.6,18.7 | v23,19 24.2,20.2 27.45,20.2 U1.P$D2
  Route2 0.152: v17.6,18.7 17.8,18.9 23,18.9 v23,19
P0.01/XL2  (via drill 0.3)
  Top 0.152: X2.2 16.95,20.35 17,20.4 | 17,20.4 17.86,21.25 C18.2 | U1.P$F2 27.45,19.9 24.6,19.9 v24.4,19.7 | v15.9,20.1 16.2,20.4 17,20.4
  Route2 0.152: v24.4,19.7 24.3,19.7 24.2,19.6 16.4,19.6 v15.9,20.1
P0.13  (1 unrouted)
  Top 0.152: SW_UP.2 R5.1 | R5.1 | C30.1 11.32,5.43 R5.1
P0.14  (via drill 0.3)
  Top 0.152: R8.1 22.12,5.97 C31.1 | SW_ENT.2 21.6,4.7 C31.1 | v23,6.3 22.5,5.8 C31.1
  Route15 0.152: U1.P$AC9 29.3,14.05 22.9,7.65 22.9,6.4 v23,6.3
  other vias: 29.3,15.55
P1.01  (1 unrouted)
  Top 0.152: R_PWR_EPD.1 14.62,16.38 13.5,17.5 Q1.1
P1.02  (via drill 0.3)
  Top 0.152: SW_DN.2 32.7,4.8 C29.1 33.12,6.18 R7.1 32.5,6.28 v32.5,7 | v35.7,17.3 35.2,16.8 33.8,16.8 U1.P$W24
  Route15 0.152: v32.5,7 31.9,7.6 31.9,14.5 32.4,15 33.9,15 34.1,15.2 34.1,16.4 35,17.3 v35.7,17.3
PMIC_INT  (via drill 0.3)
  Top 0.152: v25.6,13.1 25.6,12 IC1.A1
  Route15 0.152: v25.6,13.1 26.2,13.7 26.2,14.9 26.4,15.1 26.9,15.1 27.4,15.6 27.4,17.15 U1.P$T2
  other vias: 27.55,17.3
PREVGH  (via drill 0.3)
  Top 0.152: EPD_C9.2 11.8,11.8 11.8,12.8 v11.75,12.85 11.35,13.25 J1.21 10.95,13.25 | D5.1 3.55,9.8 v3.8,9.8
  Route2 0.152: v3.8,9.8 4.2,10.2 9.1,10.2 v11.75,12.85 11.8,12.9
PREVGL  (via drill 0.3)
  Top 0.152: J1.23 11.05,12.25 11.2,12.1 11.2,10.25 EPD_C11.2 10.86,9.75 v10.8,9.7 | D2.2 9.55,7.8 v10.8,7.8
  Route2 0.152: v10.8,7.8 v10.8,9.7
RESE  (via drill 0.3)
  Top 0.152: Q2.2 11.4,25.1 v11.4,24.2 11.4,22.5 11.15,22.25 J1.3 | R1_EP_DR.2 18.02,13.28 v18,13.3
  Route15 0.152: v18,13.3 17.8,13.5 10.6,13.5 9.6,14.5 9.6,22.4 v11.4,24.2
RESET  (via drill 0.3)
  Top 0.152: TP_RESET.TP 41.4,9.9 v42.5,11 | J2.6 43,15.45 v43,15.4
  Route2 0.152: v43,15.4 43,15 44.5,13.5 44.5,12.1 43.4,11 v42.5,11
  Route15 0.152: U1.P$AC13 30.5,15.75 32.65,15.75 33.3,16.4 33.3,17.4 33.8,17.9 36.2,17.9 38.1,16 38.1,15.7 39.3,14.5 42.1,14.5 v43,15.4
  other vias: 30.3,15.55
RF
  Top 0.152: L1.2 39.7,25.86 C4.1 C22.1
  Top 0.762: L1.2 39.7,29.6 38.8,30.5 ANT1.1
SCK  (via drill 0.3)
  Top 0.152: U1.P$A12 29.8,21.8 v29.8,22.2 | v11.4,17.7 10.95,17.25 J1.13
  Route15 0.152: v29.8,22.2 29.6,22.2 27.2,24.6 15.5,24.6 11.4,20.5 v11.4,17.7
SCL/1.4C
  Top 0.152: U3.7 18.63,3.9 19.3,3.9 19.4,4 19.4,6.3 18.8,6.9 IC2.C1
SCL/2.4C  (via drill 0.3)
  Top 0.152: TP_SCL.TP 37.9,19.9 v37.6,19.6 | v34.7,14.2 34.2,13.7 R4.1 | R17.2 20.07,17.8 20.7,17.8 20.8,17.9 v20.8,18.1 | v18.2,20.2 18.4,20 18.68,20 IC3.12 | v25,12.5 25,11.9 25.4,11.5 IC1.B1
  Route2 0.152: v37.6,19.6 37.6,17.1 35.1,14.6 | 35.1,14.6 v34.7,14.2 | 35.1,14.6 33.9,15.8 27.9,15.8 27.9,18.2 27.8,18.3 U1.P$M2 27.45,18.2 25.1,18.2 24.45,17.55 24.45,17.15 | 24.45,17.15 v24.4,17.1 | 24.45,17.15 24.45,13.05 v25,12.5
  Route15 0.152: v18.2,20.2 18.2,19.7 19.8,18.1 v20.8,18.1 20.8,17.1 21,16.9 24.2,16.9 v24.4,17.1
  other vias: 27.55,18.3 27.55,18.3
SDA/1.4C  (via drill 0.3)
  Top 0.152: U3.8 18.59,4.98 v18.6,5
  Route15 0.152: v18.6,5 18.6,6.9 IC2.B2
  other vias: 19.3,7.6
SDA/2.4C  (via drill 0.3)
  Top 0.152: TP_SDA.TP 42.6,23.7 v40,23.7 | U1.P$L1 26.75,18.85 v26,18.85 25.7,18.55 22.75,18.55 22.23,19.07 R18.2 | R2.1 31.2,10.28 v31.2,10.3 | v24.5,11.3 24.7,11.3 24.9,11.1 IC1.C1 | v19.3,17.7 19.25,17.75 IC3.2
  Route2 0.152: v31.2,10.3 25.3,10.3 24.5,11.1 v24.5,11.3 | v23.9,19 22.4,17.5 19.5,17.5 v19.3,17.7
  Route15 0.152: v40,23.7 40,23.1 35.3,18.4 25.9,18.4 25.9,18.3 | 25.9,18.3 25.6,18.3 25.52,18.38 v26,18.85 25.85,19 v23.9,19 | 25.9,18.3 25.9,14.3 24.3,12.7 24.3,11.5 v24.5,11.3
SWDCLK  (via drill 0.3)
  Top 0.152: TP_SWDCLK.TP 44,19.3 44.9,18.4 v44.9,17.7 | U1.P$AA24 34,16.5 v38.7,16.5 | v41.6,16.7 41.65,16.7 J2.4
  Route2 0.152: v44.9,17.7 43.6,16.4 41.9,16.4 v41.6,16.7 41.3,16.4 38.8,16.4 v38.7,16.5
SWDIO
  Top 0.152: TP_SWDIO.TP 41.4,21.5 41.4,17.2 40.9,16.7 40.9,16.18 | 40.9,16.18 J2.2 | U1.P$AC24 38.75,15.55 39.5,16.3 40.78,16.3 40.9,16.18
SWO  (via drill 0.3)
  Top 0.152: TP_SWO.TP 38.8,7.4 v38.8,7.8 | v32.7,14.2 32.7,14.9 U1.P$AD22
  Route2 0.152: 32.7,14 v32.7,14.2
  Route15 0.152: v38.8,7.8 38.8,8 32.7,14.1 v32.7,14.2
VBAT/1.2A  (via drill 0.3)
  Top 0.152: U3.2 U3.3 16.05,3.35 15.8,3.1 v15.8,2.2 | TP_VBAT.TP 28.86,2.9 27,4.76 C27.1 26.45,4.8 v25.6,4.8
  Route2 0.152: v25.6,4.8 21.1,4.8 18.5,2.2 v15.8,2.2
VBAT/2.5C
  Top 0.152: C37.1 26.3,11.1 IC1.C2
VBUS/1.5D
  Top 0.152: C43.1 20.45,28.83 J4.A9_B4 20.6,29.5 21.2,30.1 24.8,30.1 25.4,29.5 J4.A4_B9 25.34,28.92 C42.1 25.14,27.1 23.5,25.45 23.5,24.5 23.7,24.3 D3.5
VBUS/2.6D  (via drill 0.3)
  Top 0.152: C21.1 20.1,21.8 | 20.1,21.8 19.9,21.8 19,22.7 C38.1 | IC1.A2 25.9,12.4 27.55,14.05 U1.P$AD2 22.75,15.05 v22.2,15.6 | v20.1,23 20.1,21.8
  Route15 0.152: v22.2,15.6 21.4,16.4 19.1,16.4 | 19.1,16.4 19,16.4 | 19.1,16.4 18.3,17.2 17.9,17.2 16.8,18.3 16.8,22.7 17.1,23 v20.1,23
VREG  (via drill 0.3)
  Top 0.152: IC9.A3 IC9.A2 IC9.A1 32.45,11.45 C39.1 32.45,12.2 31.86,12.8 v31.3,12.8 | TP_VREG.TP 31,8.76 C24.2 C23.2 30.8,10.84 v30.8,11.1 | IC1.B2 27.3,11.5 v27.7,11.1
  Route2 0.152: v31.3,12.8 31.3,11.7 30.8,11.2 v30.8,11.1 v27.7,11.1
(copper drawn outside any net)
  shapes: Bottom area x1